# Altium PCB SLT.PcbDoc (part 3 of 8)
Units mm, origin at the board's own origin, x right, y up, seen from the top; angles counter-clockwise.
Board outline 150 x 66 mm, 6 copper layers (L1 TOP, L2 GND 1, L3 SIGNAL, L4 PWR, L5 GND 2, L6 BOT), stack 1.598 mm thick; 797 components, 541 nets, 2680 pads, 2120 vias.
Unrouted connection lines stored in the file: 31.
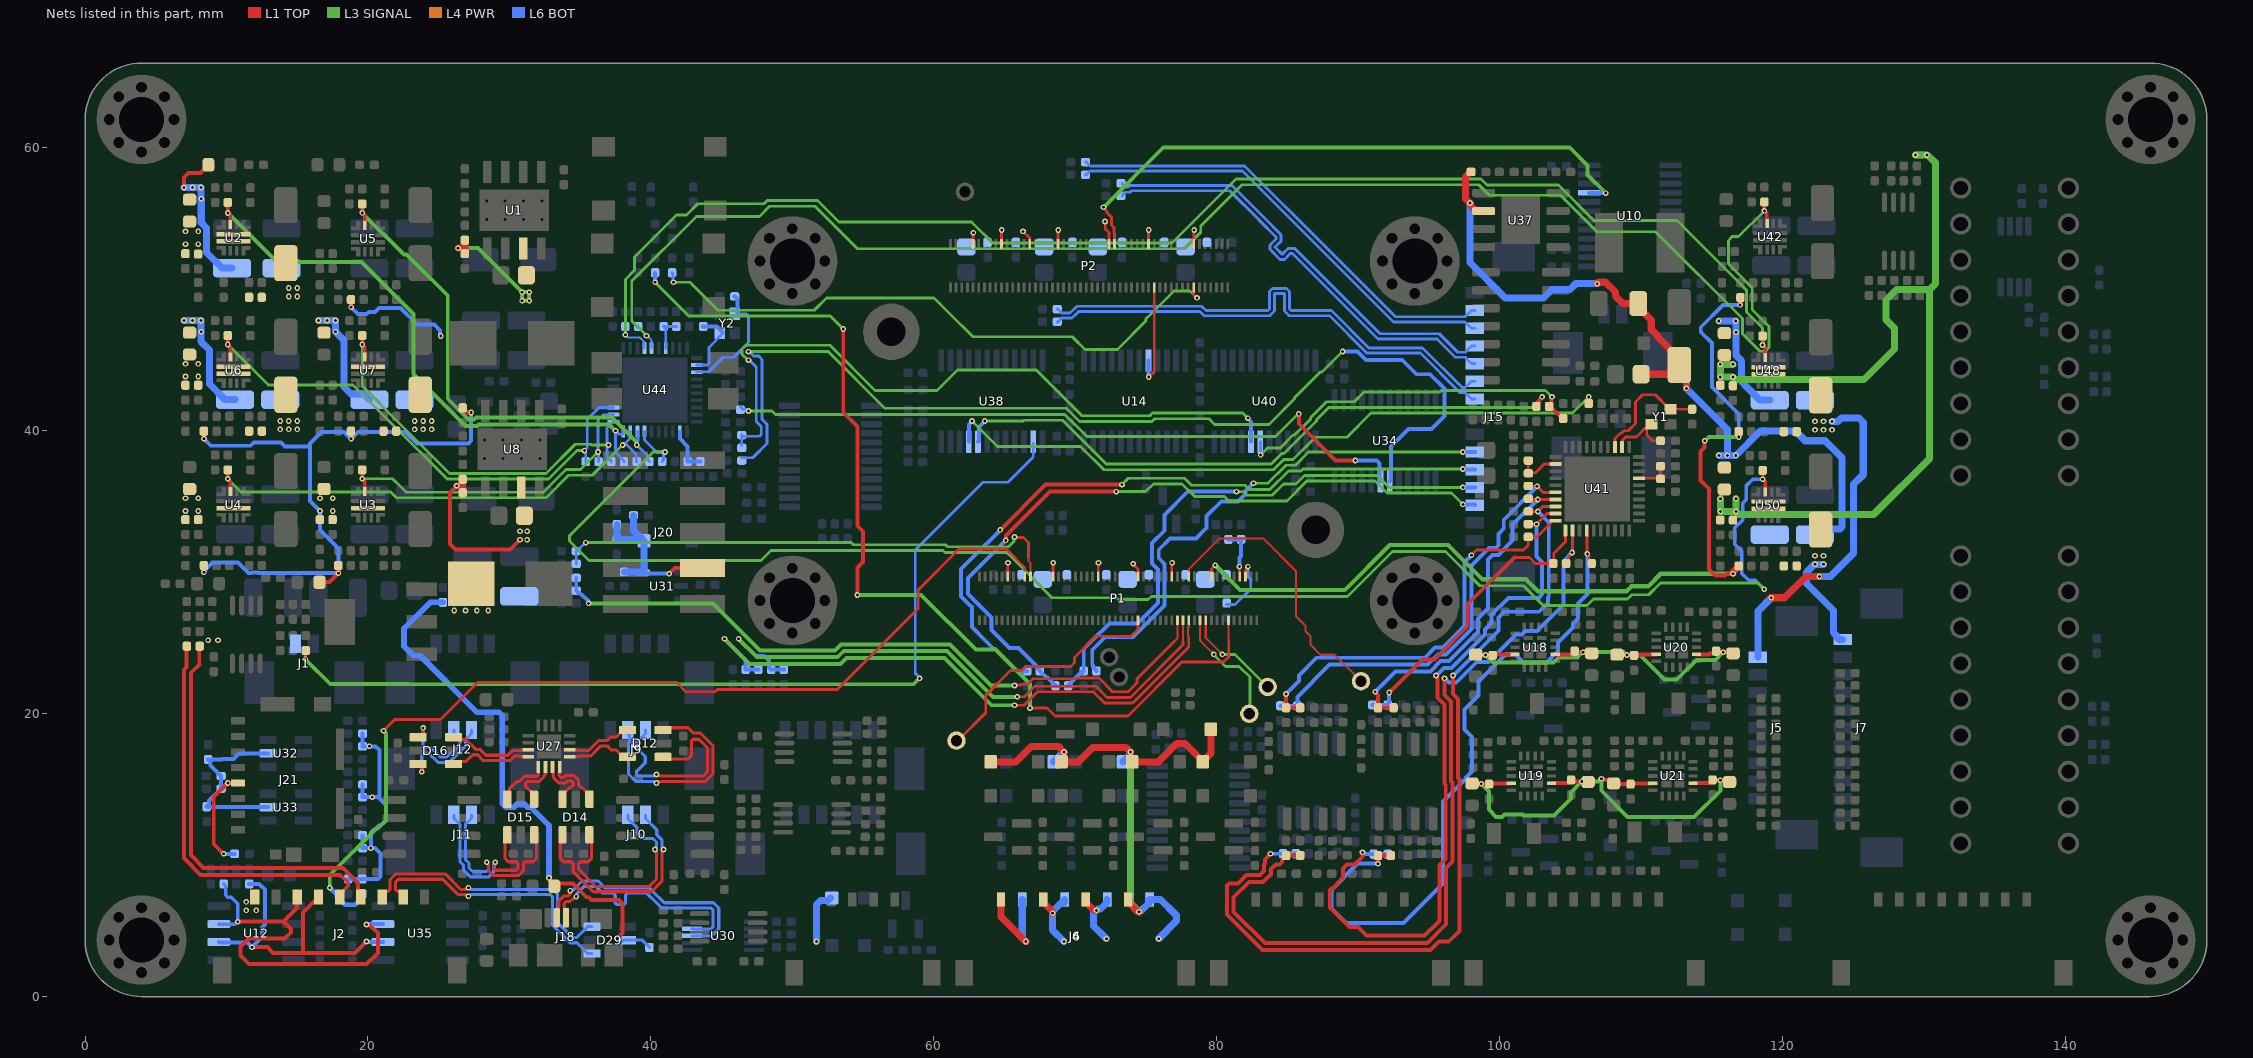
[diagram p7: the nets of this part, all layers, seen from the top]

## Via types
v1: diameter 0.4, hole 0.2, L1 TOP to L6 BOT, tented both sides, 2120 vias

## Nets (pads, with @x,y where several pads share a name; then routed paths per layer and width w, separated by ;. In a path a pad name is that pad's centre, name@x,y a point inside that pad or via, vN(x,y) a via of type N, cw(c..) or ccw(c..) an arc to the next point about the centre after c; other vN are vias at no path point) (continued)
+5V_SOM: C10.2 C18.2 C32.2 C47.2 C48.2 C49.2 C50.2 C51.2 C52.2 C53.2 C54.2 C55.2 C56.2 C57.2 C58.2 C59.2 C60.2 C260.1 C261.1 C262.1 C263.1 C264.1 C265.1 C266.1 D9.2 D29.5 JP2.1 JP10.1 L2.2 P1.11 P1.27 P1.43 P1.57 P1.69 P1.83 P2.9 P2.19 P2.29 P2.39 P2.57 P2.71 P2.87 R11.2 R19.2 R21.2 R27.2 R38.2 R43.2 R51.2 R305.2 R328.2 R336.2 U3.5 | length 176.4
  L1 TOP w0.2: P2.9@62.779,53.22 62.779,53.979 v1(62.8,54) ; P2.19@64.779,53.22 64.779,54.179 v1(64.8,54.2) ; P1.11@65.225,29.69 65.225,30.649 v1(65.246,30.67) ; v1(66.3,54.1) 66.779,53.621 P2.29@66.779,53.22 ; P1.27@68.425,29.69 68.425,30.649 v1(68.446,30.67) ; P2.39@68.779,53.22 68.779,54.179 v1(68.8,54.2) ; P1.43@71.625,29.69 71.625,30.649 v1(71.646,30.67) ; v1@72.123,54.7 72.123,54.277 72.379,54.021 P2.57@72.379,53.43 ; v1(74.1,30.6) 74.1,30.546 74.425,30.221 P1.57@74.425,29.69 ; P2.71@75.179,53.22 75.179,54.179 v1(75.2,54.2) ; P1.69@76.825,29.69 76.825,30.649 v1(76.846,30.67) ; P2.87@78.379,53.22 78.379,54.179 v1(78.4,54.2) ; P1.83@79.625,29.69 79.625,30.225 v1(79.9,30.5)
  L1 TOP w0.28: D9.2@16.575,29.3 17.273,29.3 v1(17.908,29.935) ; v1(32.8,8.4) 32.8,8.264 33.175,7.889 JP10.1@33.175,7.8 33.375,8 34.493,8 35.464,7.029 35.634,7.029 35.814,6.85 37.75,6.85 38,6.6 38,4.5 v1(37.6,4.1) ; v1(72.1,54.8) 72.123,54.777 v1@72.123,54.7 ; v1(114.5,39.3) 114.477,39.277 114.477,38.807 114.21,38.54 114.21,36.497 114.8,35.907 114.8,30.215 115.24,29.775 115.946,29.775 116.048,29.877 116.477,29.877 v1(116.5,29.9) ; R328.2@116.892,39.94 116.896,39.936 116.896,39.569 v1(116.9,39.565) ; v1(117,48.9) 117.009,48.909 117.009,49.408 R305.2@117.017,49.416
  L1 TOP w0.3: v1(8.4,30) R21.2@8.4,30.475 ; R38.2@8.4,39.975 8.404,39.971 8.404,39.439 v1(8.408,39.435) ; R19.2@17.9,30.475 17.904,30.471 17.904,29.939 v1(17.908,29.935) ; R43.2@18.8,39.975 18.804,39.971 18.804,39.439 v1(18.808,39.435) ; R27.2@18.8,49.275 18.804,49.271 18.804,48.739 v1(18.808,48.735) ; R51.2@26.7,41.625 26.7,41.6 26.85,41.45 26.875,41.45 27.006,41.319 27.281,41.319 v1(27.3,41.3)
  L1 TOP w0.5: v1(116.5,29.9) 116.5,30.022 116.843,30.365 116.843,30.39 R336.2@116.893,30.44
  L3 SIGNAL w0.28: v1(114.5,39.3) 114.532,39.3 114.798,39.565 v1(116.9,39.565)
  L3 SIGNAL w0.3: v1(79.9,30.5) 81.65,28.75 83,28.75 89.058,28.75 92.233,31.925 96.358,31.925 98.783,29.5 101.873,29.5 102.713,28.66 108.96,28.66 109.308,29.008 110.499,29.008 111.392,29.9 v1(116.5,29.9)
  L6 BOT w0.22: v1(37.6,4.1) 37.872,3.828 38.045,4 D29.5@38.355,4 39.4,4 39.9,3.5 C10.2@39.9,3.475
  L6 BOT w0.28: v1(8.4,30) 8.4,30.032 8.51,30.142 8.51,30.203 9.007,30.7 10.8,30.7 11.565,29.935 11.742,29.935 11.797,29.99 12.203,29.99 12.258,29.935 v1(17.908,29.935) 17.908,31.692 16.607,32.993 v1(16.607,34.335) 15.9,35.042 15.9,38.9 ; v1(8.408,39.435) 8.898,38.945 11.693,38.945 11.938,39.19 13.862,39.19 14.152,38.9 15.9,38.9 ; v1(18.808,48.735) 19.298,48.245 19.911,48.245 20.066,48.4 20.5,48.4 20.79,48.69 22.31,48.69 23.5,47.5 24.7,47.5 25.1,47.1 25.1,46.782 25.15,46.732 v1(25.15,46.7) ; v1(27.3,41.3) 27.3,39.3 27.1,39.1 23.452,39.1 22.627,39.925 19.298,39.925 v1(18.808,39.435) 18.318,39.925 16.725,39.925 15.9,39.1 15.9,38.9 ; v1(116.9,39.565) 116.9,41.2 115,43.1 115,46.2 114.216,46.984 114.216,47.323 115.793,48.9 v1(117,48.9)
  L6 BOT w0.4: C32.2@25.3,27.875 24.4,27.875 22.55,26.025 22.55,24.772 23.222,24.1 23.7,24.1 27.7,20.1 29.266,20.1 29.5,19.866 29.5,13.634 29.734,13.4 30.322,13.4 30.572,13.65 31.028,13.65 31.278,13.4 31.5,13.4 32.8,12.1 v1(32.8,8.4)
  other v1: 26.1,27.3 26.9,27.3 27.7,27.3 28.5,27.3 17.507,34.335 16.607,35.235 17.507,35.235
+5V_TEC: C45.2 C46.2 C98.2 C99.2 C100.2 C101.2 C102.2 C103.2 C104.2 C105.2 C120.2 C121.2 C122.2 C123.2 C124.2 C125.2 C126.2 C127.2 D8.1 JP6.2 R45.2 R46.2 U7.6 U18.4 U18.11 U19.4 U19.11 U20.4 U20.11 U21.4 U21.11 | length 71.9
  L1 TOP w0.28: C121.2@98.3,24.175 98.325,24.15 v1(99,24.15) 99.475,24.15 C101.2@99.5,24.125 99.56,24.185 101.06,24.185 U18.4@101.075,24.2 ; v1(98.7,15.05) 99.225,15.05 C105.2@99.25,15.025 99.31,15.085 100.81,15.085 U19.4@100.825,15.1 ; U19.11@103.675,15.1 104.845,15.1 105.05,15.305 C104.2@105.05,15.325 105.152,15.223 105.777,15.223 v1(105.8,15.2) ; U18.11@103.925,24.2 105.095,24.2 105.3,24.405 C100.2@105.3,24.425 105.375,24.35 v1(105.9,24.35) ; v1(107.2,15.4) 107.232,15.4 107.317,15.315 107.81,15.315 108.075,15.05 109.225,15.05 C127.2@109.25,15.025 109.31,15.085 110.81,15.085 U21.4@110.825,15.1 ; C125.2@108.3,24.175 108.325,24.15 v1(109,24.15) 109.475,24.15 C123.2@109.5,24.125 109.56,24.185 111.06,24.185 U20.4@111.075,24.2 ; U21.11@113.675,15.1 114.844,15.1 115.05,15.305 C126.2@115.05,15.325 115.062,15.313 115.587,15.313 v1(115.6,15.3) 115.623,15.277 116.148,15.277 C98.2@116.25,15.175 ; U20.11@113.925,24.2 114.783,24.2 114.829,24.246 115.141,24.246 115.3,24.405 C122.2@115.3,24.425 115.375,24.35 v1(115.8,24.35) 116.425,24.35 C124.2@116.5,24.275
  L3 SIGNAL w0.28: v1(98.7,15.05) 99.24,14.51 99.24,13.217 99.747,12.71 100.153,12.71 100.333,12.89 101.599,12.89 101.679,12.81 103.853,12.81 105.04,13.997 105.04,14.44 v1(105.8,15.2) 106.968,15.2 107.168,15.4 v1(107.2,15.4) 107.2,14.557 109.047,12.71 113.753,12.71 115.6,14.557 v1(115.6,15.3) ; v1(99,24.15) 99.54,23.61 103.817,23.61 104.176,23.969 105.486,23.969 105.868,24.35 108.768,24.35 108.968,24.15 109.908,24.15 111.641,22.417 112.517,22.417 113.9,23.8 115.25,23.8 v1(115.8,24.35)
  L6 BOT w0.5: v1(16.501,47.8) v1(17.101,47.8) v1(17.701,47.8) 17.701,47 18.3,46.401 18.3,43.1 18.8,42.6 19.7,42.6 C45.2@20.1,42.2
  other v1: 23.3,40.1 23.9,40.1 24.5,40.1 23.3,40.7 23.9,40.7 24.5,40.7 17.717,47
+12V: C3.1 C4.2 C5.2 C7.2 C30.2 C241.1 D2.1 D36.2 JP1.2 R2.2 R4.2 R5.2 R50.2 U1.7 U2.6 U8.7 | length 30.2
  L1 TOP w0.28: v1(7.001,57.2) 7.001,57.926 7.314,58.239 8.175,58.239 8.725,58.789 D36.2@8.725,58.8 ; v1(26.28,36.114) 25.8,35.634 25.8,32 26.19,31.61 30.06,31.61 v1(30.75,32.3)
  L1 TOP w0.5: v1(26.28,36.114) 26.294,36.1 26.7,36.1 ; v1(26.372,52.909) 26.841,52.909 26.85,52.9 C4.2@26.85,53.475
  L3 SIGNAL w0.28: v1(26.372,52.909) 27.791,52.909 v1(30.9,49.8) ; v1(30.9,49.8) v1(30.9,49.2) v1(31.4,49.2) v1(31.4,49.8) v1(30.9,49.8)
  L6 BOT w0.5: v1(7.001,57.2) v1(7.601,57.2) v1(8.201,57.2) 8.201,56.416 v1(8.217,56.4) 8.217,54.731 8.6,54.349 8.6,53.2 8.6,52.6 9.7,51.5 C5.2@10.4,51.5
  other v1: 31.25,32.3 30.75,32.9 31.25,32.9 14.4,49.5 15,49.5 14.4,50.1 15,50.1
+12V_IN: C2.2 C21.2 C237.2 C286.2 C291.2 J1.2 J2.1 JP1.1 JP3.1 JP5.1 JP8.1 JP9.1 R1.2 R14.2 R33.2 R324.2 R332.2 U2.5 U4.5 U6.5 U48.5 U50.5 | length 63.8
  L3 SIGNAL w0.5: v1(115.6,35.2) v1(115.6,34.3) 116.477,34.3 v1(116.7,34.3) ; v1(116.499,44.7) v1(115.599,44.7) v1(115.599,43.8) v1(116.499,43.8) 116.667,43.632 121.475,43.632 125.76,43.632 127.9,45.773 127.9,47.249 127.3,47.849 127.3,49.249 128.051,50 130.4,50 ; v1(116.7,35.2) v1(116.7,34.3) ; v1(129.4,59.5) 130.249,59.5 130.8,58.949 130.8,50.4 130.4,50 ; v1(116.7,34.3) 116.9,34.1 121.476,34.1 126.449,34.1 130.4,38.051 130.4,50
  L4 PWR w0.5: v1(129.4,59.5) 129.975,59.5
  other v1: 11.4,6.1 12.1,6.1 11.4,6.7 8.7,25.2 9.4,25.2 7.107,34.335 8.007,34.335 7.107,35.235 8.007,35.235 7.107,43.835 8.007,43.835 7.107,44.735 8.007,44.735 7.1,53.2 8,53.2 7.1,54.1 8,54.1 130.2,59.5
+12V_Laser: C206.1 C228.2 C289.2 C290.2 D27.1 D31.1 J7.1 JP9.2 R267.2 R333.2 R334.2 U37.6 U50.6 | length 63.1
  L1 TOP w0.5: C228.2@97.975,58.3 97.925,58.25 97.888,58.25 97.595,57.957 97.595,56.405 v1(97.9,56.1) 97.9,55.975 98.34,55.535 U37.6@98.865,55.535 ; v1(106.9,50.4) 107,50.5 107.49,50.5 108.182,49.807 108.182,49.518 108.7,49 R267.2@109.8,49 109.8,48.75 110.715,47.835 110.715,47.166 111.15,46.731 111.15,46.65 112.7,45.1 D27.1@112.7,44.65 ; C206.1@110,44 112.125,44 112.7,44.575 D27.1@112.7,44.65 ; v1(113.2,43) 113.2,44.15 D27.1@112.7,44.65
  L6 BOT w0.5: v1(97.9,56.1) 97.9,51.9 100.4,49.4 103.1,49.4 103.7,50 104.977,50 105.377,50.4 v1(106.9,50.4) ; v1(113.2,43) 116.094,40.106 v1(116.094,38.265) ; v1(115.494,38.265) v1(116.094,38.265) ; C290.2@122.293,32.665 122.693,33.065 124.05,33.065 124.2,33.215 124.2,38.1 123,39.3 121.6,39.3 120.9,40 118.429,40 v1(116.694,38.265) v1(116.094,38.265) ; v1(122.893,30.565) 122.265,30.565 121.7,30 121.7,29.2 123.6,27.3 123.6,25.73 123.85,25.48 123.85,25.4 124,25.25 J7.1@124.25,25.25
  other v1: 122.293,30.565 122.293,31.165 122.893,31.165
+12V_Photo: C284.2 C285.2 D30.1 J5.1 JP8.2 R325.2 R326.2 U48.6 | length 31.9
  L1 TOP w0.5: v1(119.2,28.2) 120.146,28.2 121.654,29.707 v1(122.6,29.707)
  L6 BOT w0.5: v1(115.493,47.765) v1(116.693,47.765) 116.709,47.749 v1(116.709,46.965) 116.709,45.338 117.099,44.949 117.099,43.501 117.3,43.3 117.3,43.257 118.392,42.165 C284.2@119.092,42.165 ; J5.1@118.25,24 118.25,27.25 v1(119.2,28.2) ; v1(122.6,29.707) 123.373,29.707 125,31.334 125,36.2 125.7,36.9 125.7,40.6 125.4,40.9 124.151,40.9 123.917,40.665 v1(123.492,40.665)
  other v1: 122.292,40.065 122.892,40.065 123.492,40.065 122.292,40.665 122.892,40.665
+12V_Solenoid: C43.2 C44.2 D7.1 D17.1 D18.1 D19.1 D20.1 D21.1 D22.1 D23.1 D24.1 J4.1 J4.3 J4.5 J4.7 J6.1 J6.3 J6.5 J6.7 JP5.2 R35.2 R36.2 U6.6 | length 70.4
  L1 TOP w0.5: D18.1@64.019,16.603 65.803,16.603 66.9,17.7 68.8,17.7 v1(69.2,17.3) 69.2,16.784 69.019,16.603 70.219,16.603 71.216,17.6 73.6,17.6 v1(73.9,17.3) 73.9,16.722 74.019,16.603 75.88,16.603 77.177,17.9 77.747,17.9 D21.1@79.019,16.628 ; J4.1@64.75,6.87 64.75,5.65 v1(66.5,3.9) ; J4.3@67.75,6.87 67.75,6.67 68.4,6.02 v1(68.4,5.9) ; J4.5@70.75,6.87 70.8,6.82 70.8,6.62 71.32,6.1 v1(71.5,6.1) ; J4.7@73.75,6.87 73.8,6.82 73.8,6.62 74.42,6 v1(74.5,6) ; D21.1@79.019,16.603 D21.1@79.019,16.628 ; D17.1@79.581,18.897 79.581,17.19 D21.1@79.019,16.628
  L3 SIGNAL w0.5: v1(73.9,17.3) 73.9,6.6 v1(74.5,6)
  L6 BOT w0.5: v1(7.001,47.8) v1(7.601,47.8) v1(8.201,47.8) 8.201,46.299 8.793,45.708 8.793,43.307 9.9,42.2 C43.2@10.6,42.2 ; v1(51.7,3.9) 51.7,6.507 51.993,6.8 52.516,6.8 D24.1@52.697,6.981 ; J6.7@66.25,6.87 66.25,4.15 v1(66.5,3.9) ; D23.1@68.481,16.603 68.481,16.628 69.153,17.3 v1(69.2,17.3) ; v1(69.2,3.9) 68.4,4.7 68.4,6.02 69,6.62 69.2,6.62 69.25,6.67 J6.5@69.25,6.87 ; v1(72.2,4.1) 71.3,5 71.3,5.9 71.593,6.193 71.773,6.193 72.25,6.67 J6.3@72.25,6.87 ; D22.1@73.381,16.603 73.381,16.628 73.9,17.147 v1(73.9,17.3) ; v1(74.5,6) 74.58,6 75.2,6.62 75.2,6.82 J6.1@75.25,6.87 76.03,6.87 77.143,5.757 77.143,5.343 v1(75.9,4.1)
  other v1: 13.8,40.1 14.4,40.1 15,40.1 13.8,40.7 14.4,40.7 15,40.7 8.217,47
+JTAG_POWER: C190.2 C197.1 D26.2 J20.2 R238.1 R239.2 U31.5 | length 13.2
  L1 TOP w0.28: v1(41.3,29.9) 41.7,30.3 J20.2@43.661,30.3
  L6 BOT w0.28: U31.5@39.46,29.978 39.515,29.923 41.277,29.923 v1(41.3,29.9)
  L6 BOT w0.5: R239.2@37.6,33.375 37.6,33.35 R238.1@37.6,32.325 39.416,32.325 D26.2@39.519,32.222 ; C197.1@38.125,30.025 39.221,30.025 39.268,29.977 U31.5@39.46,29.978 39.472,29.977 39.519,30.024 D26.2@39.519,32.222 ; C190.2@38.775,34.025 38.775,32.966 39.294,32.447 D26.2@39.519,32.222
+V_BAT_RTC: P1.93 R89.1 R276.1 | length 3.6
  L1 TOP w0.15: v1(81.6,30.4) 81.613,30.387 81.613,29.702 P1.93@81.625,29.69
  L6 BOT w0.28: R89.1@80.821,32.325 R276.1@81.721,32.325 81.721,31.16 81.6,31.039 81.6,31 v1(81.6,30.4)
+VCC_SD: C192.2 C193.2 C194.2 C195.2 J21.P4 R232.2 R233.2 R234.2 R235.2 R236.2 R237.2 R240.2 R241.1 R248.1 U32.5 U33.5 | length 39
  L1 TOP w0.28: v1(9.8,10.1) 9.1,10.8 9.1,14.1 v1(10.1,15.1) J21.P4@10.802,15.1
  L6 BOT w0.28: C192.2@8.6,13.455 C192.2@8.6,13.425 8.754,13.579 8.754,13.854 9.6,14.7 C194.2@9.625,14.7 ; C192.2@8.7,13.41 9.485,13.41 10.978,13.41 10.988,13.4 U33.5@12.945,13.4 ; v1(9.8,10.1) R248.1@10.575,10.1 ; v1(10.1,15.1) 10.077,15.077 10.032,15.077 9.655,14.7 C194.2@9.625,14.7 ; U32.5@12.945,17.2 10.9,17.2 10.51,16.81 9.702,16.81 9.667,16.775 C193.2@8.7,16.775 8.854,16.621 8.854,16.339 8.861,16.339 9.6,15.6 C195.2@9.625,15.6 C194.2@9.625,14.7 ; R241.1@18.6,8.325 R240.2@19.6,8.325 20.721,8.325 20.885,8.489 20.885,10.115 20.5,10.5 v1(20.2,10.5) ; R234.2@19.625,11.4 R235.2@19.625,10.5 v1(20.2,10.5) ; R236.2@19.625,15 R237.2@19.625,14.1 v1(20.3,14.1) 20.71,14.1 20.81,14 ; R232.2@19.625,18.6 R233.2@19.625,17.7 v1(20.1,17.7) 20.546,17.7 20.81,17.436 20.81,14.1 20.81,14 ; v1(20.2,10.5) 20.2,11.6 20.41,11.81 20.503,11.81 20.79,12.097 20.9,12.097 21.266,12.462 21.266,13.544 20.81,14
+VSD_3V3: P1.17 R240.1 | length 69.4
  L1 TOP w0.15: 65.765,31 66.425,30.34 P1.17@66.425,29.69
  L1 TOP w0.2: v1(21.1,18.8) 21.9,19.6 25.134,19.6 27.734,22.2 41.835,22.2 42.485,21.55 44.515,21.55 44.69,21.725 53.18,21.725 58.9,27.445 58.9,28.747 61.793,31.64 65.125,31.64 65.765,31
  L3 SIGNAL w0.28: v1(17.3,7.7) 17.3,8.593 20.597,11.89 20.693,11.89 21.27,12.467 21.27,18.598 21.1,18.768 v1(21.1,18.8)
  L6 BOT w0.3: v1(17.3,7.7) 17.781,7.219 17.781,7.062 18.243,6.6 18.3,6.6 18.4,6.5 19.1,6.5 19.451,6.851 19.451,7.126 R240.1@19.6,7.275
ADC1_REGCAPA: C215.2 C216.2 U41.7 | length 2.5
  L1 TOP w0.2: U41.7@109.845,36.65 111.325,36.65 C216.2@111.375,36.6 C215.2@111.375,37.5
ADC1_REGCAPD: C214.2 C226.2 U41.22 | length 3.2
  L1 TOP w0.2: C214.2@102.025,37.9 102.025,37.049 102.049,37.024 102.068,37.006 102.062,37 C226.2@102.025,37 102.058,37.033 102.533,37.033 103.15,37.65 U41.22@103.955,37.65
ADC1_XTAL1: C181.2 U41.12 Y1.3 | length 4.4
  L1 TOP w0.2: U41.12@108.65,38.845 108.68,38.875 108.68,39.33 108.915,39.565 109.665,39.565 110.4,40.3 110.4,39.9 110.4,39.7 110.8,39.3 C181.2@111.375,39.3
ADC1_XTAL2: C182.2 U41.13 Y1.1 | length 8.7
  L1 TOP w0.2: U41.13@108.15,38.845 108.15,39.45 108.55,39.85 108.634,39.85 108.793,40.009 109.095,40.009 109.604,40.518 109.604,42.041 110.114,42.55 111,42.55 111.925,41.625 112.075,41.625 112.175,41.525 113.5,41.525 C182.2@113.6,41.625
ADC2_nERROR: R300.1 R354.1 U40.20 | length 49.9
  L3 SIGNAL w0.2: v1(46.9,45) 46.864,45 46.45,45.414 46.45,45.786 46.714,46.05 52.65,46.05 55.85,42.85 60.214,42.85 61.665,44.302 67.238,44.302 70.474,41.065 75.263,41.065 75.448,41.25 81.843,41.25 82.193,40.9 v1(82.2,40.9)
  L6 BOT w0.2: R300.1@46.425,39 46.425,39.618 R354.1@46.425,39.7 46.507,39.618 47.683,39.618 47.8,39.735 47.8,40.3 47.45,40.65 47.45,44.502 46.952,45 v1(46.9,45)
  L6 BOT w0.28: v1(82.2,40.9) 82.2,40.868 82.425,40.643 U40.20@82.425,39.23
ADC2_nSYNC: R294.1 U34.18 | length 73.3
  L3 SIGNAL w0.2: v1(46.9,45.6) 52.534,45.6 56.544,41.59 69.384,41.59 70.309,40.665 75.429,40.665 75.614,40.85 79.45,40.85 79.85,40.45 83.686,40.45 85.5,42.264 85.5,42.336 87.314,44.15 87.446,44.15 v1(88.9,45.604)
  L6 BOT w0.2: R294.1@46.425,38.1 47.2,38.1 48.2,39.1 48.2,40.466 47.85,40.816 47.85,45.05 47.621,45.279 47.275,45.279 46.954,45.6 v1(46.9,45.6)
  L6 BOT w0.28: v1(88.9,45.604) 88.904,45.6 89.948,45.6 90.538,45.01 93.112,45.01 94.122,44 95.086,44 96.1,42.986 96.1,41.036 95.185,40.121 93.563,40.121 92.33,38.888 92.33,37.239 92.29,37.199 92.29,36.495 U34.18@92.225,36.43
ADC2_REGCAPA: C247.2 C248.2 U44.7 | length 2.5
  L6 BOT w0.2: U44.7@41.05,45.845 41.05,47.225 C248.2@40.9,47.375 C247.2@41.8,47.375
ADC2_REGCAPD: C246.2 C249.2 U44.22 | length 3.3
  L6 BOT w0.28: U44.22@42.05,39.955 42.05,39.443 42.6,38.893 C249.2@42.6,37.825 C246.2@43.5,37.825
ADC2_SPI_nCS: R290.1 U34.19 | length 49.9
  L1 TOP w0.28: v1(85.8,41.2) 85.8,40.5 88.4,37.9 v1(89.8,37.9)
  L3 SIGNAL w0.2: v1(46.9,41.4) 48.564,41.4 48.814,41.15 69.258,41.15 70.818,39.59 84.157,39.59 v1@85.783,41.217 ; v1(85.8,41.2) v1@85.8,41.254
  L6 BOT w0.2: R290.1@46.325,41.7 46.494,41.531 46.715,41.531 46.846,41.4 v1(46.9,41.4)
  L6 BOT w0.28: v1(89.8,37.9) 91.31,37.9 91.51,37.7 91.51,36.495 U34.19@91.575,36.43
ADC2_XTAL1: C185.2 U44.12 Y2.3 | length 5.1
  L6 BOT w0.2: U44.12@43.245,44.65 43.983,44.65 44.1,44.767 44.1,45.9 45.075,46.875 Y2.3@45.075,46.925
  L6 BOT w0.28: C185.2@43.7,47.375 44.675,47.375 45.075,46.975 Y2.3@45.075,46.925
ADC2_XTAL2: C184.2 U44.13 Y2.1 | length 8.5
  L6 BOT w0.2: U44.13@43.245,44.15 43.275,44.18 44.094,44.18 45.114,45.2 45.864,45.2 46.9,46.236 46.9,48.1 46.725,48.275 Y2.1@46.125,48.275
  L6 BOT w0.28: C184.2@45.925,49.5 45.945,49.5 46.125,49.32 Y2.1@46.125,48.275
ADC_nERROR: R299.1 R352.1 U40.19 | length 25.8
  L1 TOP w0.28: v1(103.7,42.4) 103.7,42.368 103.654,42.321 103.654,41.879 R299.1@103.5,41.725 103.5,41.705 103.659,41.546 103.754,41.546 104.5,40.8 R352.1@104.5,40.775
  L3 SIGNAL w0.2: v1(83.1,38.3) 83.59,38.79 84.488,38.79 85.398,39.7 85.502,39.7 86.65,40.848 86.65,40.952 87.748,42.05 89.719,42.05 90.419,42.75 95.772,42.75 95.872,42.85 103.25,42.85 v1(103.7,42.4)
  L6 BOT w0.2: U40.19@83.075,39.23 83.087,39.218 83.087,38.312 v1(83.1,38.3)
ADC_nSYNC: R288.1 U38.20 | length 45.2
  L1 TOP w0.28: R288.1@102.6,41.725 102.754,41.879 102.754,42.121 103,42.368 v1(103,42.4)
  L3 SIGNAL w0.2: v1(63.6,40.7) 66.348,40.7 66.398,40.75 69.092,40.75 72.192,37.65 83.851,37.65 84.591,38.39 84.758,38.39 87.05,40.682 87.05,40.786 87.914,41.65 102.25,41.65 v1(103,42.4)
  L6 BOT w0.28: U38.20@63.125,39.23 63.19,39.295 63.19,40.258 63.6,40.668 v1(63.6,40.7)
ADC_SPI_nCS: R281.1 U38.21 | length 49.3
  L1 TOP w0.28: R281.1@106.3,41.825 v1(106.3,42.4)
  L3 SIGNAL w0.2: v1(62.7,40.7) 64.5,38.9 70.377,38.9 72.027,37.25 84.017,37.25 84.737,37.97 85.394,37.97 86.974,39.55 89.214,39.55 90.914,41.25 105.15,41.25 v1(106.3,42.4)
  L6 BOT w0.28: U38.21@62.475,39.23 62.475,40.443 62.7,40.668 v1(62.7,40.7)
ADC_TEMP1: C76.2 C147.2 R157.2 U41.31 | length 21.3
  L1 TOP w0.2: 101.05,31.05 102.114,31.05 102.539,30.625 C76.2@103.8,30.625 103.819,30.644 103.819,31.325 104.65,32.156 U41.31@104.65,32.955
  L1 TOP w0.28: v1(92.2,21.5) 94.541,23.841 95.392,23.841 97.71,26.158 97.71,27.71 101.05,31.05
  L6 BOT w0.28: C147.2@91,20.625 R157.2@92.1,20.625 92.177,20.702 92.177,21.477 v1(92.2,21.5)
ADC_TEMP2: C78.2 C155.2 R163.2 U41.29 | length 51.5
  L1 TOP w0.2: C78.2@102.025,33.4 v1(102.6,33.4) 103.35,34.15 U41.29@103.955,34.15
  L1 TOP w0.28: v1(90.3,10.2) 90.292,10.192 90.292,9.892 89.74,9.34 89.197,9.34 88.91,9.053 88.91,8.41 88.52,8.02 88.52,7.976 88.204,7.66 88.124,7.66 88,7.536 88,6.3 89.38,4.92 89.98,4.92 90.59,4.31 94.689,4.31 95.74,5.361 95.74,9.297 96.19,9.747 96.19,14.96 96.09,15.06 96.09,20.653 95.61,21.133 95.61,22.558 95.5,22.668 v1(95.5,22.7)
  L6 BOT w0.28: 90.457,10.075 C155.2@91.1,10.075 R163.2@92.1,10.075 ; v1(95.5,22.7) 95.532,22.7 96.072,23.24 96.604,23.24 98.955,25.591 98.955,25.948 98.955,25.955 99.43,26.43 99.43,27.002 100.618,28.19 102.766,28.19 102.93,28.354 102.93,28.402 102.99,28.462 102.99,30.741 102.6,31.131 v1(102.6,33.4)
ADC_TEMP3: C84.2 C163.2 R169.2 U41.26 | length 30.5
  L1 TOP w0.2: C84.2@102.025,36.1 102.044,36.081 v1(102.65,36.081) 103.081,35.65 U41.26@103.955,35.65
  L6 BOT w0.28: C163.2@84.495,20.56 R169.2@85.695,20.56 85.695,21.195 87.98,23.48 94.908,23.48 95.628,24.2 96.206,24.2 97.995,25.989 97.995,26.345 97.995,30.464 99.241,31.71 99.71,31.71 99.91,31.91 99.91,32.703 100.29,33.083 100.29,33.697 102.65,36.057 v1(102.65,36.081)
ADC_TEMP4: C79.2 C171.2 R175.2 U41.28 | length 62.8
  L1 TOP w0.2: C79.2@102.025,34.3 v1(102.7,34.3) 103.05,34.65 U41.28@103.955,34.65
  L1 TOP w0.28: v1(83.8,10.105) 83.4,9.705 83.4,9.411 83.34,9.351 83.34,8.897 83.053,8.61 82.103,8.61 81.503,8.01 80.884,8.01 80.72,7.846 80.72,5.801 83.231,3.29 95.111,3.29 95.721,3.9 96.4,3.9 97.15,4.65 97.15,15.357 97.06,15.447 97.06,21.041 96.71,21.391 96.71,22.69 v1(96.7,22.7)
  L6 BOT w0.28: v1@83.795,10.1 v1(83.8,10.105) 84.69,10.105 C171.2@84.695,10.11 R175.2@85.595,10.11 ; v1(96.7,22.7) 96.732,22.7 96.792,22.76 96.802,22.76 99.91,25.868 99.91,26.803 100.317,27.21 102.782,27.21 103.41,27.838 103.41,28.203 103.47,28.263 103.47,33.53 v1(102.7,34.3)
ADC_TEMP5: C75.2 C149.2 R159.2 U41.32 | length 58.8
  L1 TOP w0.2: C75.2@104.7,30.625 104.869,30.794 104.869,31.09 105.125,31.346 v1(105.125,31.4) 105.138,31.413 105.138,32.942 U41.32@105.15,32.955
  L1 TOP w0.28: R159.2@85.9,9.975 C149.2@84.9,9.975 84.9,9.945 84.6,9.645 84.6,9.504 84.436,9.34 84.197,9.34 84.057,9.2 84.014,9.2 83.85,9.036 83.85,8.65 83.7,8.5 83.664,8.5 83.264,8.1 82.272,8.1 81.2,7.028 81.2,6 83.4,3.8 94.9,3.8 96.22,5.12 96.22,9.098 96.67,9.548 96.67,15.158 96.57,15.258 96.57,20.852 96.1,21.322 v1(96.1,22.5)
  L6 BOT w0.28: v1(96.1,22.5) 96.132,22.5 96.422,22.21 96.931,22.21 98.381,23.66 99.203,23.66 101.153,25.61 101.592,25.61 101.822,25.84 102.633,25.84 104.5,27.707 104.5,30.775 v1(105.125,31.4)
ADC_TEMP6: C77.2 C157.2 R165.2 U41.30 | length 29.6
  L1 TOP w0.2: v1(98,31.2) 98.369,31.569 101.694,31.569 102.025,31.9 C77.2@102.025,32.5 102.65,32.5 103.635,33.485 103.635,33.62 103.665,33.65 U41.30@103.955,33.65
  L1 TOP w0.28: v1(84.9,21.4) C157.2@84.9,20.425 85.035,20.29 85.035,20.401 85.059,20.425 R165.2@85.9,20.425
  L6 BOT w0.28: v1(84.9,21.4) 85.81,22.31 85.81,22.703 87.067,23.96 94.709,23.96 95.429,24.68 96.007,24.68 97.515,26.188 97.515,30.715 v1(98,31.2)
ADC_TEMP7: C165.2 C239.2 R171.2 U41.34 | length 49.3
  L1 TOP w0.2: U41.34@106.15,32.955 106.175,32.93 106.175,31.325 v1(106.2,31.3) 106.2,31.246 106.331,31.115 106.331,30.794 C239.2@106.5,30.625
  L1 TOP w0.28: v1(91.4,9.4) C165.2@91.4,9.975 ; C165.2@91.4,9.955 C165.2@91.4,9.975 ; R171.2@92.3,9.975 C165.2@91.4,9.975
  L6 BOT w0.28: v1(91.4,9.4) 89.957,9.4 88.11,7.553 88.11,6.229 89.139,5.2 93.193,5.2 96,8.007 96,13.8 97.61,15.41 97.61,15.501 98.04,15.931 98.04,18.36 97.5,18.9 97.5,20.3 98.49,21.29 98.49,22.268 100.422,24.2 101.107,24.2 101.697,23.61 103.303,23.61 104.11,24.417 104.11,25.038 105.17,26.098 105.17,26.349 105.54,26.719 105.54,27.791 106.2,28.451 v1(106.2,31.3)
ADC_TEMP8: C83.2 C173.2 R177.2 U41.27 | length 24.7
  L1 TOP w0.2: C83.2@102.025,35.2 102.075,35.15 v1(102.7,35.15) U41.27@103.955,35.15
  L1 TOP w0.28: v1(91.2,21.55) 91.2,21.518 91.4,21.318 C173.2@91.4,20.425 R177.2@92.5,20.425
  L6 BOT w0.28: v1(91.2,21.55) 92.65,23 95.107,23 95.827,23.72 96.405,23.72 98.475,25.79 98.475,26.146 98.475,26.726 99.19,27.441 99.19,28.479 99.16,28.509 99.16,30.891 99.499,31.23 99.909,31.23 100.919,32.24 100.919,33.369 v1(102.7,35.15)
ALT_BOOT_SD: P1.90 R82.2 | length 70
  L1 TOP w0.15: P1.90@80.825,26.61 80.825,25.199 80.85,25.174 80.85,25.1
  L1 TOP w0.2: v1(66.8,20.4) 68.01,20.4 68.56,19.85 73.732,19.85 77.532,23.65 80.486,23.65 80.85,24.014 80.85,25.1
  L1 TOP w0.28: v1(53.6,47.2) 53.6,41.3 54.6,40.3 54.6,33.268 54.99,32.878 54.99,30.713 54.6,30.323 v1(54.6,28.4)
  L3 SIGNAL w0.2: v1(40.3,50.5) 42.675,48.125 52.675,48.125 v1(53.6,47.2)
  L3 SIGNAL w0.28: v1(54.6,28.4) 59.107,28.4 62.973,24.534 64.359,24.534 66.8,22.093 v1(66.8,20.4)
  L6 BOT w0.28: v1(40.3,50.5) R82.2@40.3,51.175
ALT_BOOT_USB: P2.88 R83.2 | length 43.2
  L1 TOP w0.15: P2.88@78.379,50.14 78.379,49.603 78.582,49.4 v1(78.6,49.4)
  L3 SIGNAL w0.2: v1(41.6,50.5) 42.764,50.5 44.739,48.525 51.549,48.525 52.424,49.4 60.012,49.4 60.4,49.012 61.112,48.3 62.762,46.65 69.786,46.65 70.686,45.75 72.986,45.75 74.977,47.741 74.977,47.889 75.388,48.3 76.968,49.88 78.12,49.88 v1(78.6,49.4)
  L6 BOT w0.2: R83.2@41.5,51.175 41.562,51.113 41.562,50.538 v1(41.6,50.5)
BOOT_MODE_0: P1.75 TP7.0 | length 20.4
  L1 TOP w0.15: P1.75@78.025,29.69 78.05,29.715 78.05,30.241 78.809,31 80.209,32.4 83.285,32.4 85.6,30.085 85.6,26.899 86.275,26.224 86.275,25.824 86.625,25.474 86.625,24.874 87.327,24.172 88.328,24.172 89.824,22.676 TP7.0@89.824,22.024
BOOT_MODE_1: P1.80 TP8.0 | length 8.7
  L1 TOP w0.15: P1.80@78.825,26.61 78.825,25.175 78.9,25.1 v1(79.8,24.2)
  L3 SIGNAL w0.2: v1(79.8,24.2) 79.8,24.164 80.612,23.351 81.585,23.351 82.35,22.586 82.35,20.05 TP8.0@82.3,20
BOOT_MODE_2: P1.82 TP9.0 | length 7.1
  L1 TOP w0.15: P1.82@79.225,26.61 79.225,25.376 79.501,25.1 v1(80.4,24.2)
  L3 SIGNAL w0.2: v1(80.4,24.2) 81.302,24.2 83.6,21.902 TP9.0@83.6,21.9
BOOT_MODE_3: P1.58 TP6.0 | length 17.6
  L1 TOP w0.2: TP6.0@61.7,18.1 63.671,20.071 63.671,21.307 65.414,23.05 66.205,23.05 66.505,23.35 69.686,23.35 69.95,23.614 69.95,23.972 71.078,25.1 71.458,25.48 73.013,25.48 73.043,25.45 73.898,25.45 73.938,25.49 73.955,25.49 74.425,25.96 P1.58@74.425,26.61
BOOT_USB_D_N: J18.2 U30.8 | length 17.6
  L1 TOP w0.22: J18.2@33.35,5.58 33.466,5.696 33.466,6.36 33.485,6.379 33.485,6.753 33.836,7.105 34.128,7.105 34.266,7.243 34.266,7.466 v1(34.3,7.5)
  L6 BOT w0.22: v1(34.3,7.5) 34.334,7.534 34.49,7.534 35.136,8.18 36.269,8.18 36.749,7.7 39.873,7.7 40.54,7.033 40.548,7.033 40.941,6.64 44.429,6.64 44.8,6.269 44.8,4.794 44.306,4.3 U30.8@42.9,4.3
BOOT_USB_D_P: J18.3 U30.9 | length 16.9
  L1 TOP w0.22: J18.3@34,5.58 33.884,5.696 33.884,6.36 33.865,6.379 33.865,6.596 33.994,6.725 34.285,6.725 34.53,6.97 34.57,6.97 34.676,7.076 v1(34.724,7.076)
  L6 BOT w0.22: v1(34.724,7.076) 34.759,7.11 34.759,7.266 35.293,7.8 36.112,7.8 36.2,7.712 36.592,7.32 37.258,7.32 cw(c37.258,7.1) 37.478,7.1 37.478,6.669 ccw(c37.624,6.669) 37.624,6.524 38.06,6.524 ccw(c38.06,6.669) 38.206,6.669 38.206,7.1 cw(c38.426,7.1) 38.426,7.32 38.9,7.32 39.716,7.32 40.383,6.653 40.391,6.653 40.783,6.26 44.271,6.26 44.4,6.131 44.4,4.931 44.249,4.78 42.92,4.78 U30.9@42.9,4.8
CAM_CK_N: J15.6 R194.2 | length 35.1
  L6 BOT w0.2: R194.2@68.725,48.6 68.777,48.6 69.047,48.33 69.63,48.33 70.1,48.8 78.946,48.8 79.246,48.5 83.4,48.5 83.605,48.5 83.723,48.617 83.723,49.855 83.933,50.066 84.94,50.066 85.151,49.855 85.151,48.617 85.268,48.5 85.9,48.5 88.109,48.5 90.749,45.86 94.549,45.86 97.354,43.055 97.555,43.055 98,43.5 J15.6@98.25,43.5
CAM_CK_P: J15.7 R195.2 | length 35.1
  L6 BOT w0.2: R195.2@68.725,47.7 68.777,47.7 69.047,47.97 69.779,47.97 70.109,48.3 70.249,48.44 78.796,48.44 79.096,48.14 83.4,48.14 83.755,48.14 84.083,48.468 84.083,49.706 84.791,49.706 84.791,48.468 85.119,48.14 85.9,48.14 87.96,48.14 90.6,45.5 94.4,45.5 97.205,42.695 97.555,42.695 98,42.25 J15.7@98.25,42.25
CAM_D0_N: J15.2 R123.2 | length 32.2
  L6 BOT w0.2: R123.2@70.725,59 70.777,59 71.047,58.73 81.97,58.73 82.181,58.519 87.495,53.205 92.64,48.06 97.56,48.06 98,48.5 J15.2@98.25,48.5
CAM_D0_P: J15.3 R189.2 | length 32.2
  L6 BOT w0.2: R189.2@70.725,58.1 70.777,58.1 71.047,58.37 81.821,58.37 87.345,52.845 92.491,47.7 97.55,47.7 98,47.25 J15.3@98.25,47.25
CAM_D1_N: J15.4 R190.2 | length 31.6
  L6 BOT w0.2: R190.2@73.325,57.5 73.325,57.452 73.547,57.23 73.742,57.23 73.847,57.335 81.074,57.335 81.179,57.23 81.39,57.019 ; 81.39,57.019 83.155,55.255 83.3,55.109 84.546,53.863 84.546,53.399 84.13,52.982 84.63,52.481 85.047,52.898 85.511,52.898 85.616,52.793 85.762,52.647 91.549,46.86 95.732,46.86 97.037,45.555 97.583,45.555 97.7,45.672 97.7,45.7 98,46 J15.4@98.25,46
CAM_D1_P: J15.5 R193.2 | length 31.6
  L6 BOT w0.2: R193.2@73.325,56.6 73.325,56.648 73.547,56.87 73.891,56.87 73.996,56.975 80.925,56.975 82.9,55 83.045,54.855 84.186,53.714 84.186,53.548 83.77,53.131 83.77,52.833 84.481,52.121 84.78,52.121 85.196,52.538 85.362,52.538 85.507,52.393 91.4,46.5 95.583,46.5 96.888,45.195 97.583,45.195 97.7,45.078 97.7,45.05 98,44.75 J15.5@98.25,44.75
CAM_SCL: J15.10 R196.2 | length 38
  L3 SIGNAL w0.2: v1(82.6,36.3) 83.632,36.3 84.902,37.57 85.56,37.57 86.49,38.5 v1(97.4,38.5)
  L6 BOT w0.28: R196.2@71.5,23.025 71.5,23.055 71.24,23.315 71.24,23.403 71.2,23.443 71.2,24.5 71.8,25.1 72.11,25.41 74.089,25.41 76.32,27.641 76.32,30.58 75.9,31 75.9,31.593 76.696,32.389 78.523,32.389 79.281,33.147 79.281,33.981 80.319,35.019 81.519,35.019 82.048,35.548 82.048,35.748 v1(82.6,36.3) ; v1(97.4,38.5) J15.10@98.25,38.5
CAM_SDA: J15.11 R295.2 | length 49.6
  L1 TOP w0.28: v1(64.7,33) 67.9,36.2 v1(73.3,36.2)
  L3 SIGNAL w0.2: v1(73.3,36.2) 73.75,36.65 77.714,36.65 78.214,36.15 82.007,36.15 82.307,35.85 83.748,35.85 85.068,37.17 85.956,37.17 86.086,37.3 v1(97.4,37.3)
  L6 BOT w0.28: v1(64.7,33) 62.7,31 62.5,30.8 61.93,30.23 61.93,28.298 62.5,27.728 62.69,27.538 62.69,26.117 63.707,25.1 64.236,24.571 64.322,24.571 65.868,23.025 R295.2@66.6,23.025 ; v1(97.4,37.3) 97.423,37.277 98.223,37.277 J15.11@98.25,37.25
CAM_SW_SCL: J15.12 R74.1 R297.2 | length 40.1
  L3 SIGNAL w0.2: v1(81.4,35.7) 81.409,35.691 81.9,35.691 82.141,35.45 83.914,35.45 84.714,36.25 85.602,36.25 86.202,36.85 91.349,36.85 92.199,36 v1(97.4,36)
  L6 BOT w0.28: R297.2@69.5,21.975 69.5,22 70.346,22.846 70.441,22.846 70.6,23.005 R74.1@70.6,23.025 70.6,24.579 71.121,25.1 72.411,26.39 74.39,26.39 75.84,27.84 75.84,30.203 75.42,30.623 75.42,31 75.42,32.056 76.3,32.936 76.3,34.05 77.95,35.7 v1(81.4,35.7) ; v1(97.4,36) J15.12@98.25,36
CAM_SW_SDA: J15.13 R75.1 R298.2 | length 51.2
  L1 TOP w0.28: v1(65.083,32.254) 65.106,32.276 65.106,32.599 68.207,35.7 v1(72.9,35.7)
  L3 SIGNAL w0.2: v1(72.9,35.7) 74.976,35.7 75.526,36.25 77.548,36.25 78.448,35.35 80.547,35.35 80.847,35.05 84.968,35.05 86.368,36.45 91.183,36.45 92.033,35.6 96.6,35.6 v1(97.4,34.8)
  L6 BOT w0.28: v1(65.083,32.254) 63.829,31 62.5,29.671 62.41,29.581 62.41,28.497 62.5,28.407 64.09,26.817 64.09,25.917 64.907,25.1 65.347,24.66 65.983,24.66 67.24,23.403 67.24,23.315 67.5,23.055 67.5,23.005 67.952,22.553 68.047,22.553 68.6,22 R298.2@68.6,21.975 ; v1(97.4,34.8) 97.423,34.777 98.223,34.777 J15.13@98.25,34.75
CAN_H: J2.3 R96.2 U12.7 U35.7 | length 29.5
  L1 TOP w0.28: v1(10.8,5.3) 14.037,5.3 ; J2.3@15,7.042 15,6.263 14.037,5.3 ; v1(19.9,5.1) 19.923,5.077 20.123,5.077 20.7,4.5 20.7,3.1 19.9,2.3 11.6,2.3 11,2.9 11,3.536 11.564,4.1 14.1,4.1 14.552,4.552 14.552,4.784 14.037,5.3
  L6 BOT w0.25: U12.7@9.465,5.135 10.594,5.135 10.759,5.3 v1(10.8,5.3) 10.8,6.558 10.333,7.025 10.106,7.025 9.96,7.171 9.96,7.815 R96.2@9.8,7.975
  L6 BOT w0.28: v1(19.9,5.1) 19.932,5.1 19.959,5.126 21.056,5.126 U35.7@21.065,5.135
CAN_L: J2.4 R98.1 U12.6 U35.6 | length 22.4
  L1 TOP w0.28: v1(11.8,3.5) 12.897,3.5 13.297,3.1 15.4,3.1 ; J2.4@16.5,7.042 15.4,5.942 15.4,3.1 ; v1(19.9,3.9) 19.1,3.1 15.4,3.1
  L6 BOT w0.28: U12.6@9.465,3.865 9.511,3.819 11.481,3.819 v1(11.8,3.5) 12.535,4.235 12.535,4.472 12.51,4.497 12.51,4.903 12.71,5.103 12.71,7.59 12.515,7.785 12.484,7.785 12.294,7.975 R98.1@11.6,7.975 ; v1(19.9,3.9) 19.932,3.9 19.959,3.874 21.056,3.874 U35.6@21.065,3.865
COM_LASER_DAC_CS: P2.59 U10.9 | length 43.1
  L1 TOP w0.2: v1(72,55.8) 72,55.746 72.25,55.496 72.25,55.414 72.563,55.101 72.563,54.7 72.563,54.547 72.729,54.381 72.729,53.99 72.779,53.94 P2.59@72.779,53.22
  L3 SIGNAL w0.28: v1(72,55.8) 76.22,60.02 104.953,60.02 106.215,58.758 106.215,58.085 v1(107.5,56.8)
  L6 BOT w0.28: U10.9@106.33,56.825 106.343,56.813 107.488,56.813 v1(107.5,56.8)
COM_PHOTO_ADC_CONV: P2.74 U14.8 | length 7.7
  L1 TOP w0.15: 75.579,48.3 P2.74@75.579,50.14
  L1 TOP w0.2: v1(75.2,43.8) 75.579,44.179 75.579,48.3
  L6 BOT w0.28: U14.8@75.175,44.97 75.175,43.857 75.2,43.832 v1(75.2,43.8)
COMM_PWR_EN: P1.95 R70.1 | length 4.6
  L1 TOP w0.15: P1.95@82.025,29.69 82.05,29.715 82.05,30.182 82.2,30.332 v1(82.2,30.4)
  L6 BOT w0.2: R70.1@80.7,27.725 81.3,27.725 82.4,28.825 82.4,29.485 82.2,29.685 v1(82.2,30.4)
CONN_USB_1_N: D12.1 U27.14 | length 4.7
  L1 TOP w0.22: U27.14@34.27,17.45 34.29,17.43 34.796,17.43 34.836,17.39 35.59,17.39 36.311,18.111 36.909,18.111 37.157,18.36 37.545,18.36 38.035,18.85 D12.1@38.345,18.85
CONN_USB_1_P: D12.3 U27.13 | length 4.7
  L1 TOP w0.22: U27.13@34.27,16.95 34.29,16.97 34.796,16.97 34.836,17.01 35.747,17.01 36.469,17.731 36.909,17.731 37.2,17.44 37.545,17.44 38.035,16.95 D12.3@38.345,16.95
CONN_USB_1_R_N: D12.6 J9.3 | length 15.8
  L1 TOP w0.22: v1(40.4,15.11) 40.459,15.169 40.549,15.169 40.6,15.22 43.857,15.22 44.38,15.743 44.38,17.757 43.496,18.641 42.989,18.641 42.62,19.01 41.015,19.01 D12.6@40.855,18.85
  L6 BOT w0.22: J9.3@38.375,18.85 38.375,18.6 38.486,18.489 38.486,17.999 38.42,17.932 38.42,15.743 38.943,15.22 40.241,15.22 40.351,15.11 v1(40.4,15.11)
CONN_USB_1_R_P: D12.4 J9.2 | length 15.6
  L1 TOP w0.22: v1(40.4,15.71) 40.434,15.676 40.524,15.676 40.6,15.6 43.7,15.6 44,15.9 44,17.6 43.4,18.2 42.989,18.2 42.86,18.071 42.86,17.03 42.62,16.79 41.015,16.79 D12.4@40.855,16.95
  L6 BOT w0.22: J9.2@39.625,18.85 39.625,18.6 38.891,17.866 38.891,17.684 39.6,16.975 39.6,16.54 38.971,15.911 38.971,15.729 39.1,15.6 40.241,15.6 40.351,15.71 v1(40.4,15.71)
CONN_USB_2_N: D14.1 U27.12 | length 4
  L1 TOP w0.22: U27.12@33.55,16.23 33.53,16.21 33.53,15.827 33.51,15.807 33.51,15.625 33.639,15.496 33.821,15.496 33.965,15.64 34.539,15.64 34.89,15.288 34.89,14.949 35.019,14.82 35.095,14.82 35.65,14.265 D14.1@35.65,13.955
CONN_USB_2_P: D14.3 U27.11 | length 4
  L1 TOP w0.22: U27.11@33.05,16.23 33.07,16.21 33.07,15.704 33.13,15.644 33.13,15.467 33.481,15.116 33.979,15.116 34.123,15.26 34.381,15.26 34.51,15.131 34.51,14.949 34.381,14.82 34.305,14.82 33.75,14.265 D14.3@33.75,13.955
CONN_USB_2_R_N: D14.6 J10.3 | length 15.3
  L1 TOP w0.22: D14.6@35.65,11.445 35.81,11.285 35.81,9.78 35.57,9.54 35.019,9.54 34.89,9.411 34.89,9 36.09,7.8 39.891,7.8 40.4,8.309 40.4,10.241 40.29,10.351 v1(40.29,10.4)
  L6 BOT w0.22: J10.3@38.375,12.85 38.375,12.6 39.009,11.966 39.009,11.659 39.482,11.186 40.144,11.186 40.4,10.93 40.4,10.559 40.29,10.449 v1(40.29,10.4)
CONN_USB_2_R_P: D14.4 J10.2 | length 15.8
  L1 TOP w0.22: D14.4@33.75,11.445 33.59,11.285 33.59,9.78 33.83,9.54 34.381,9.54 34.51,9.411 34.51,8.843 35.933,7.42 40.049,7.42 40.78,8.151 40.78,10.241 40.89,10.351 v1(40.89,10.4)
  L6 BOT w0.22: J10.2@39.625,12.85 39.625,12.6 40.413,11.812 40.413,11.454 40.78,11.087 40.78,10.559 40.89,10.449 v1(40.89,10.4)
CONN_USB_3_N: D15.3 U27.9 | length 3.8
  L1 TOP w0.22: D15.3@29.85,13.955 29.994,14.099 29.994,14.694 30.5,15.2 30.682,15.2 31.062,15.58 31.935,15.58 32.064,15.709 32.064,16.216 U27.9@32.05,16.23
CONN_USB_3_P: D15.1 U27.10 | length 3.6
  L1 TOP w0.22: D15.1@31.75,13.955 31.75,14.265 31.126,14.889 31.126,15.071 31.255,15.2 32.092,15.2 32.444,15.551 32.444,15.618 32.53,15.704 32.53,16.21 U27.10@32.55,16.23
CONN_USB_3_R_N: D15.4 J11.3 | length 12.8
  L1 TOP w0.22: v1(29,9.5) 28.966,9.466 28.966,9.316 28.901,9.251 28.901,9.069 29.03,8.94 30.481,8.94 30.61,9.069 30.61,9.411 30.481,9.54 29.93,9.54 29.69,9.78 29.69,11.285 D15.4@29.85,11.445
  L6 BOT w0.22: J11.3@26.075,12.85 26.075,12.6 26.365,12.31 26.381,12.31 26.51,12.181 26.51,9.541 26.76,9.291 26.76,8.94 27.23,8.47 28.539,8.47 28.89,8.821 28.89,9.341 29,9.451 v1(29,9.5)
CONN_USB_3_R_P: D15.6 J11.2 | length 12.8
  L1 TOP w0.22: v1(28.4,9.5) 28.4,9.451 28.521,9.331 28.521,8.911 28.872,8.56 30.639,8.56 30.99,8.911 30.99,9.411 31.119,9.54 31.67,9.54 31.91,9.78 31.91,11.285 D15.6@31.75,11.445
  L6 BOT w0.22: J11.2@27.325,12.85 27.325,12.6 27.035,12.31 27.019,12.31 26.89,12.181 26.89,9.698 27.14,9.448 27.14,9.097 27.387,8.85 28.381,8.85 28.51,8.979 28.51,9.341 28.4,9.451 v1(28.4,9.5)
CONN_USB_4_N: D16.3 U27.7 | length 6
  L1 TOP w0.22: D16.3@26.055,18.35 26.24,18.165 26.935,18.165 27.62,17.48 27.907,17.48 28.319,17.069 29.889,17.069 30.21,17.39 30.764,17.39 30.804,17.43 31.31,17.43 U27.7@31.33,17.45
CONN_USB_4_P: D16.1 U27.8 | length 5.9
  L1 TOP w0.22: D16.1@26.055,16.45 26.24,16.635 26.935,16.635 27.4,17.1 27.75,17.1 28.161,16.689 30.046,16.689 30.367,17.01 30.764,17.01 30.804,16.97 31.31,16.97 U27.8@31.33,16.95
CONN_USB_4_R_N: D16.4 J12.3 | length 6.6
  L1 TOP w0.22: D16.4@23.545,18.35 23.688,18.35 23.873,18.535 23.873,18.973 v1(23.9,19)
  L6 BOT w0.22: v1(23.9,19) 23.9,17.748 24.029,17.619 24.43,17.619 25.109,16.94 25.583,16.94 26.51,17.867 26.51,18.181 26.381,18.31 26.365,18.31 26.075,18.6 J12.3@26.075,18.85
CONN_USB_4_R_P: D16.6 J12.2 | length 7.1
  L1 TOP w0.22: D16.6@23.545,16.45 23.615,16.45 23.8,16.265 v1(23.8,15.9)
  L6 BOT w0.22: v1(23.8,15.9) 23.8,17.01 24.029,17.239 24.273,17.239 24.952,16.56 25.74,16.56 26.89,17.71 26.89,18.181 27.019,18.31 27.035,18.31 27.325,18.6 J12.2@27.325,18.85
CONN_USB_N: D29.1 J2.8 | length 18.8
  L1 TOP w0.22: J2.8@22.5,7.042 22.5,7.232 22.28,7.453 22.069,7.453 21.94,7.582 21.94,8.1 22.14,8.3 25.3,8.3 26.39,7.21 26.941,7.21 27.051,7.1 v1(27.1,7.1)
  L6 BOT w0.22: v1(27.1,7.1) 27.149,7.1 27.259,7.21 32.904,7.21 33.033,7.081 33.033,6.524 33.033,5.071 34.294,3.81 34.775,3.81 35.535,3.05 D29.1@35.845,3.05
CONN_USB_P: D29.3 J2.7 | length 19.5
  L1 TOP w0.22: J2.7@21,7.042 21,7.232 21.22,7.453 21.431,7.453 21.56,7.582 21.56,8.257 21.983,8.68 25.457,8.68 26.547,7.59 26.941,7.59 27.051,7.7 v1(27.1,7.7)
  L6 BOT w0.22: v1(27.1,7.7) 27.149,7.7 27.259,7.59 33.061,7.59 33.413,7.239 33.413,6.524 33.413,5.229 34.451,4.19 34.775,4.19 35.535,4.95 D29.3@35.845,4.95
CONSOLE_UART1_RX: P1.76 R90.2 R128.1 | length 43.1
  L1 TOP w0.15: 78.025,25.1 78.025,25.438 77.975,25.488 77.975,26.076 78.025,26.126 P1.76@78.025,26.61
  L1 TOP w0.2: v1(65.7,20.6) 66.364,20.6 67.314,21.55 71.286,21.55 72.086,20.75 74.066,20.75 78.025,24.709 78.025,25.1
  L3 SIGNAL w0.28: v1(45.2,25.3) 46.975,23.525 53.408,23.525 53.833,23.95 60.743,23.95 64.093,20.6 v1(65.7,20.6)
  L6 BOT w0.28: v1(45.2,25.3) 46.7,23.8 R128.1@46.7,23.125 R90.2@47.6,23.125
CONSOLE_UART1_TX: P1.74 R72.1 R127.2 | length 41.8
  L1 TOP w0.15: 77.625,25.1 P1.74@77.625,26.61
  L1 TOP w0.2: v1(65.9,21.2) 65.902,21.202 66.4,21.202 67.148,21.95 71.452,21.95 72.252,21.15 73.901,21.15 77.625,24.874 77.625,25.1
  L3 SIGNAL w0.28: v1(46.2,25.3) 47.495,24.005 53.209,24.005 53.634,24.43 60.942,24.43 64.172,21.2 v1(65.9,21.2)
  L6 BOT w0.28: v1(46.2,25.3) 47.4,24.1 48,24.1 48.346,23.754 48.346,23.279 R127.2@48.5,23.125 R72.1@49.4,23.125
CONSOLE_UART2_RX: P1.19 R91.1 R253.2 | length 36.3
  L1 TOP w0.15: 66.7,31 66.7,30.777 66.825,30.652 P1.19@66.825,29.69
  L1 TOP w0.2: v1(65.7,32.5) 65.738,32.462 66.338,32.462 66.7,32.1 66.7,31
  L3 SIGNAL w0.2: v1(35.4,32.1) 54.164,32.1 54.314,31.95 60.812,31.95 60.959,31.804 65.269,31.804 65.662,32.196 65.662,32.462 v1(65.7,32.5)
  L6 BOT w0.2: R253.2@34.725,30.6 R91.1@34.725,31.5 34.775,31.5 35.375,32.1 v1(35.4,32.1)
CONSOLE_UART2_TX: P1.72 R92.1 R254.2 | length 50.3
  L1 TOP w0.15: 77,25.1 77.225,25.325 P1.72@77.225,26.61
  L1 TOP w0.2: v1(65.7,22) 65.738,22.038 66.173,22.038 66.218,22.084 66.616,22.084 66.982,22.45 66.995,22.45 67.015,22.47 70.051,22.47 70.111,22.53 71.67,22.53 72.65,21.55 73.735,21.55 74.375,22.19 74.375,22.475 77,25.1
  L3 SIGNAL w0.28: v1(35.6,27.8) 44.393,27.8 47.708,24.485 53.011,24.485 53.435,24.91 61.141,24.91 64.051,22 v1(65.7,22)
  L6 BOT w0.28: R254.2@34.725,29.6 R92.1@34.725,28.7 34.879,28.546 34.954,28.546 35.06,28.44 35.103,28.44 35.577,27.966 35.577,27.823 v1(35.6,27.8)
DSUB_I2C_EN: R107.2 U38.14 | length 66.2
  L1 TOP w0.22: v1(15.575,23.85) R107.2@15.575,24.525
  L3 SIGNAL w0.28: v1(15.575,23.85) 17.335,22.09 22.852,22.09 22.857,22.085 58.553,22.085 58.968,22.5 v1(59,22.5)
  L6 BOT w0.2: v1(59,22.5) 59,22.554 58.69,22.864 58.69,31.586 63.471,36.367 65.247,36.367 67.025,38.145 U38.14@67.025,39.124
DSUB_I2C_SCL: J2.5 R104.1 | length 28.7
  L1 TOP w0.25: J2.5@18,7.042 18,7.232 18.609,7.841 18.609,8.048 18.116,8.541 18.095,8.541
  L1 TOP w0.28: R104.1@7.185,24.815 7.185,23.306 6.99,23.111 6.99,9.789 8.179,8.6 18.036,8.6 18.095,8.541
DSUB_I2C_SDA: J2.6 R106.1 | length 28.8
  L1 TOP w0.25: 8.085,23.485 R106.1@8.085,24.815
  L1 TOP w0.28: 8.085,23.485 7.5,22.9 7.5,10 8.39,9.11 18.247,9.11 19.31,8.047 19.31,7.232 J2.6@19.5,7.042
eFUSE_ILIM_5V_CAM: C179.2 R308.2 U42.9 U44.5 | length 111.6
  L1 TOP w0.25: R308.2@118.71,56.181 v1(118.71,55.548) 118.894,55.364 U42.9@118.894,54.615
  L3 SIGNAL w0.2: v1(39.689,46.726) 38.65,47.766 38.65,50.586 43.214,55.15 47.67,55.15 48.395,55.875 51.605,55.875 54.61,52.87 60.4,52.87 77.706,52.87 78.87,54.034 78.87,54.485 79.085,54.7 81.78,57.395 98.524,57.395 99.269,56.65 104.307,56.65 106.887,54.07 111.025,54.07 117.159,47.935 117.159,46.924 117.159,46.862 118.399,45.622 118.772,45.622 119.035,45.886 119.035,46.924 119.035,47.387 117.85,48.572 117.85,50 117.85,50.11 116.601,51.359 116.174,51.786 116.174,53.462 116.438,53.726 116.601,53.726 116.888,53.726 v1(118.71,55.548)
  L6 BOT w0.15: C179.2@39.1,47.375 39.1,47.349 39.689,46.76 v1(39.689,46.726) ; v1@39.706,46.743 40.05,46.399 U44.5@40.05,45.845
eFUSE_ILIM_5V_HD4: C89.2 R41.2 U5.9 U44.28 | length 34.9
  L1 TOP w0.25: R41.2@19.593,56.04 v1(19.593,55.407) 19.777,55.223 U5.9@19.777,54.474
  L3 SIGNAL w0.28: v1(19.593,55.407) 22.408,52.592 22.532,52.468 22.724,52.468 25.64,49.553 25.64,42.267 27.097,40.81 27.503,40.81 27.625,40.932 37.261,40.932 38.977,39.216 38.977,39.023 v1(39,39)
  L6 BOT w0.2: U44.28@39.05,39.955 39.08,39.925 39.08,39.317 39.035,39.272 39.035,39.035 v1(39,39) 39.757,38.243 39.757,37.968 C89.2@39.9,37.825
eFUSE_ILIM_5V_IO: C175.2 R25.2 U3.9 U44.32 | length 24.1
  L1 TOP w0.25: R25.2@19.593,37.24 v1(19.593,36.607) 19.777,36.423 U3.9@19.777,35.674
  L3 SIGNAL w0.2: v1(19.593,36.607) 21.757,36.607 22.3,36.064 22.7,35.664 32.412,35.664 34.004,37.256 35.018,37.256 v1@36.302,38.539
  L6 BOT w0.2: C175.2@36.3,37.825 36.288,37.837 36.288,38.474 v1(36.262,38.5) 36.262,40.762 36.62,41.12 37.325,41.12 U44.32@37.355,41.15
eFUSE_ILIM_5V_TEC: C86.2 R52.2 U7.9 U44.31 | length 28.7
  L1 TOP w0.25: R52.2@19.593,46.74 v1(19.593,46.107) 19.777,45.923 U7.9@19.777,45.174
  L3 SIGNAL w0.2: v1(19.593,46.107) 19.593,43.17 22.129,40.635 25.776,36.988 32.59,36.988 34.652,39.05 35.774,39.05 35.824,39 36.984,39 v1@37.007,39.023
  L6 BOT w0.2: C86.2@37.2,37.825 37.2,37.867 36.9,38.167 36.9,38.846 37,38.946 37,39.054 36.9,39.154 36.9,40.195 U44.31@37.355,40.65
  other v1: 37,39
eFUSE_ILIM_12V: C87.2 R10.2 U2.9 U44.30 | length 41.3
  L1 TOP w0.25: R10.2@10.093,56.14 10.1,56.133 v1(10.1,55.4) 10.277,55.223 U2.9@10.277,54.574
  L3 SIGNAL w0.28: v1(10.1,55.4) 12.901,52.599 13.56,51.94 17.2,51.94 19.553,51.94 21.458,50.035 23.226,48.267 23.226,44.003 26.898,40.33 27.702,40.33 27.824,40.452 37.048,40.452 v1(37.5,40)
  L6 BOT w0.2: U44.30@38.05,39.955 38.05,39.793 38.02,39.763 37.737,39.763 v1(37.5,40) 37.5,38.486 37.8,38.186 37.8,38.167 38.1,37.867 C87.2@38.1,37.825
eFUSE_ILIM_12V_Heater: C88.2 R26.2 U4.9 U44.29 | length 34.6
  L1 TOP w0.25: R26.2@10.093,37.24 v1(10.093,36.607) 10.277,36.423 U4.9@10.277,35.674
  L3 SIGNAL w0.2: v1(10.093,36.607) 11.015,35.685 12.9,35.685 17.301,35.685 21.613,35.685 22.034,35.264 22.3,35.264 32.577,35.264 34.169,36.856 35.856,36.856 v1(38,39)
  L6 BOT w0.2: v1(38,39) 38.004,38.996 38.304,38.996 38.967,38.333 38.967,37.858 C88.2@39,37.825 ; v1@38.058,39 38.058,39.004 38.092,39.038 38.096,39.038 38.52,39.462 38.52,39.925 U44.29@38.55,39.955
eFUSE_ILIM_12V_Laser: C93.2 R339.2 U44.27 U50.9 | length 115.1
  L1 TOP w0.25: R339.2@118.586,37.206 v1(118.586,36.572) 118.77,36.389 U50.9@118.77,35.639
  L3 SIGNAL w0.2: v1(41,38.5) 40.164,38.5 34.25,32.586 34.25,32.214 35.629,30.835 47.78,30.835 48.495,31.55 60.647,31.55 60.793,31.404 65.149,31.404 65.552,31 68.352,28.2 72.922,28.2 73.052,28.07 75.148,28.07 75.378,28.3 83,28.3 89.244,28.3 92.419,31.475 96.171,31.475 98.596,29.05 101.686,29.05 103.086,27.65 106.177,27.65 106.637,28.11 109.046,28.11 109.346,28.41 110.538,28.41 111.378,29.25 118.25,29.25 v1(118.7,28.8)
  L6 BOT w0.2: U44.27@39.55,39.955 39.55,39.342 40.392,38.5 v1(41,38.5) 41,38.446 40.904,38.349 40.904,37.929 C93.2@40.8,37.825
  L6 BOT w0.25: v1(118.586,36.572) 117.887,36.572 117.418,36.103 117.418,35.118 117.175,34.875 117.175,33.7 116.625,33.15 116.625,31.975 117.1,31.5 117.1,31.024 117.1,29.929 117.604,29.425 118.075,29.425 v1(118.7,28.8)
eFUSE_ILIM_12V_Photo: C180.2 R331.2 U44.4 U48.9 | length 100.9
  L1 TOP w0.25: R331.2@118.585,46.706 v1(118.585,46.072) 118.769,45.889 U48.9@118.769,45.139
  L3 SIGNAL w0.2: v1(38.2,46.788) 38.2,50.702 38.85,51.352 38.85,52.286 41.814,55.25 42.514,55.25 43.314,56.05 48.004,56.05 48.229,56.275 51.771,56.275 53.296,54.75 62.686,54.75 62.736,54.7 64.166,53.27 76.834,53.27 78.264,54.7 81.359,57.795 98.69,57.795 99.115,57.37 104.152,57.37 106.652,54.87 112.525,54.87 116.601,50.794 117.395,50 117.45,49.945 117.45,48.406 118.585,47.271 118.585,46.924
  L3 SIGNAL w0.25: v1(118.585,46.072) 118.585,46.924
  L6 BOT w0.15: C180.2@38.2,47.375 v1(38.2,46.788) 38.388,46.6 39.215,46.6 39.495,46.32 39.495,45.9 U44.4@39.55,45.845
eFUSE_ILIM_12V_Solenoid: C85.2 R42.2 U6.9 U44.33 | length 36.7
  L1 TOP w0.25: R42.2@10.093,46.74 v1(10.093,46.107) 10.277,45.923 U6.9@10.277,45.174
  L3 SIGNAL w0.2: v1(10.093,46.107) 12.901,43.299 12.95,43.25 17.301,43.25 18.948,43.25 21.563,40.635 25.61,36.588 32.756,36.588 34.768,38.6 v1(35.3,38.6)
  L6 BOT w0.2: v1(35.3,38.6) 35.3,38.617 35.5,38.817 35.5,40.8 36.35,41.65 U44.33@37.355,41.65 ; C85.2@35.4,37.825 v1@35.4,38.446